# Altium PCB SS_MB_CONV1.1.PcbDoc (part 2 of 3)
Units mil, origin at the board's own origin, x right, y up, seen from the top; angles counter-clockwise.
Board outline 10350 x 8520 mil, 2 copper layers (Top Layer, Bottom Layer); 190 components, 282 nets, 1015 pads, 457 vias.
Unrouted connection lines stored in the file: 1.
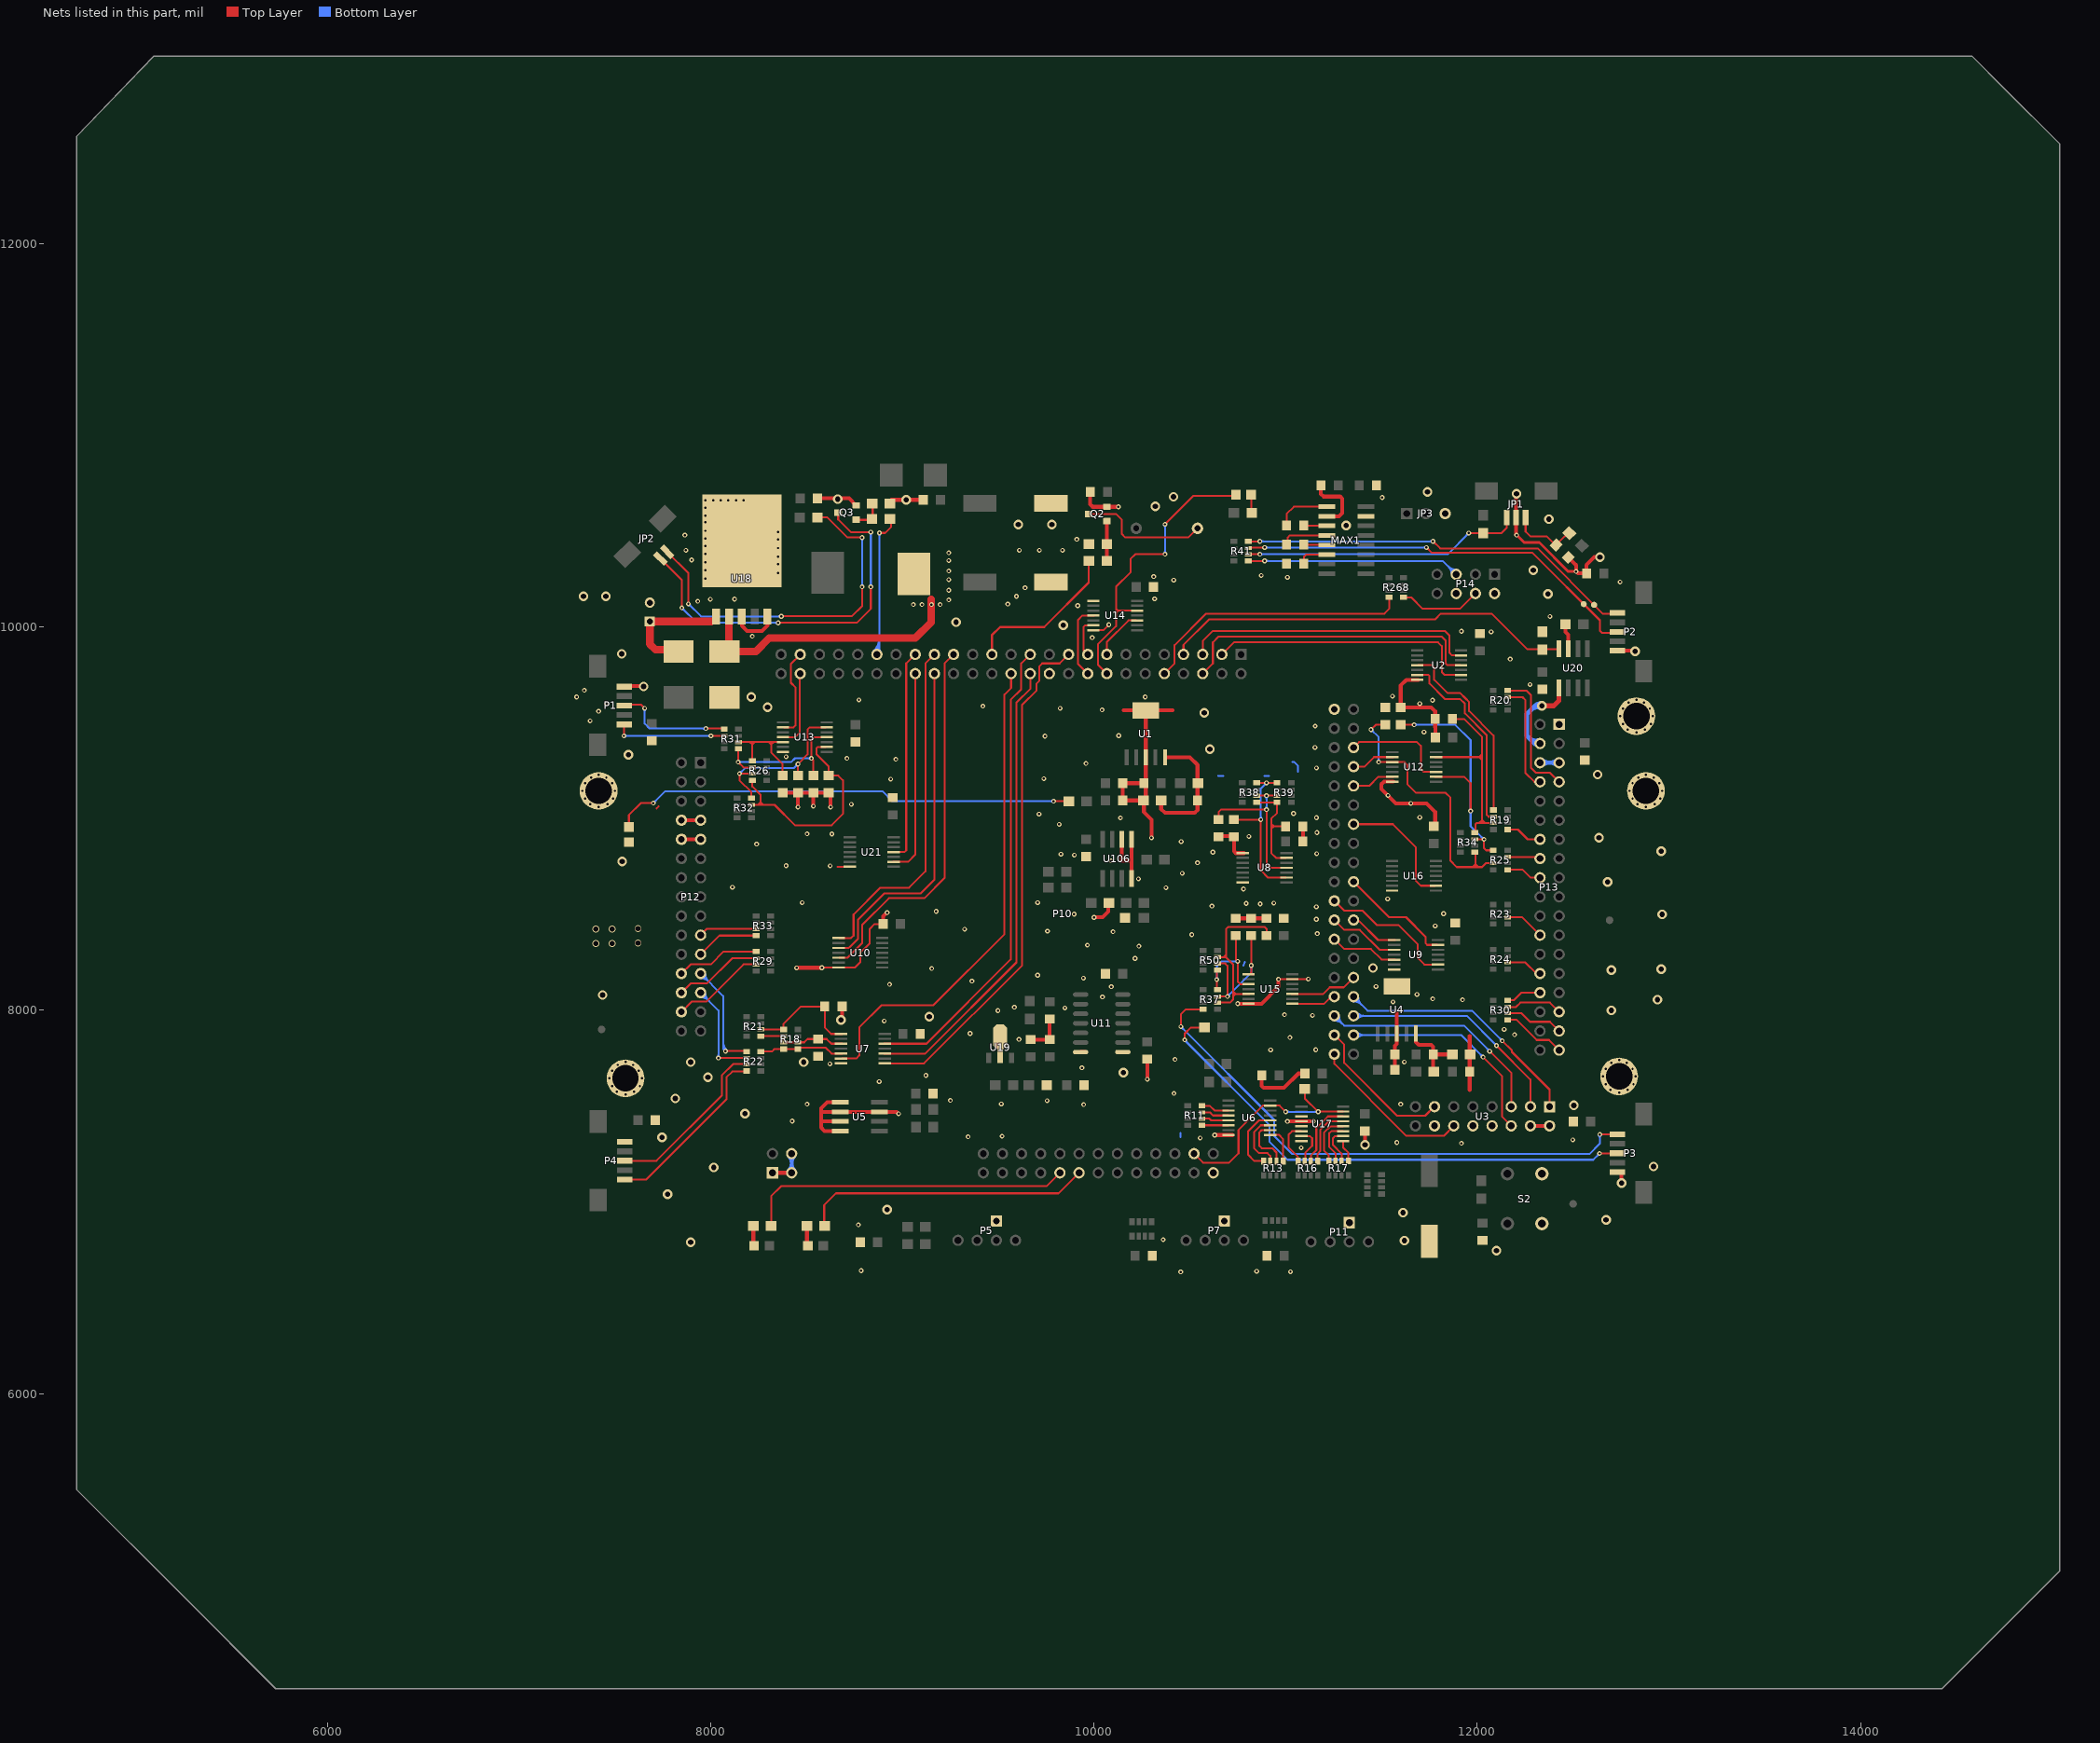
[diagram p2: the nets of this part, all layers, seen from the top]

## Via types
v1: diameter 25, hole 12, Top Layer to Bottom Layer, 365 vias
v2: diameter 50, hole 28, Top Layer to Bottom Layer, 86 vias
v3: diameter 35, hole 28, Top Layer to Bottom Layer, 6 vias

## Nets (pads, with @x,y where several pads share a name; then routed paths per layer and width w, separated by ;. In a path a pad name is that pad's centre, name@x,y a point inside that pad or via, vN(x,y) a via of type N, cw(c..) or ccw(c..) an arc to the next point about the centre after c; other vN are vias at no path point) (continued)
BT_2_F: P10.3 U2.9 | length 1418.6
  Top Layer w10: P10.3@10667,9857 10730,9920 11795,9920 11815,9900 11815,9765 11830,9750 U2.9@11910,9750
BT_3: P13.31 R30.4 | length 293.4
  Top Layer w10: R30.4@12162.99,8017 12202,8017 12225,8040 12379,8040 P13.31@12427,7992
BT_3_F: P10.127 U9.1 | length 260.7
  Top Layer w10: P10.127@11354,8471 11378,8471 11482.23,8366.77 U9.1@11571.5,8366.77
BT_4: P12.28 R29.5 | length 492.7
  Top Layer w10: P12.28@7847,7992 7900,8045 7975.96,8045 8170.96,8240 R29.5@8237.01,8240
BT_4_F: P10.31 U10.5 | length 1962.8
  Top Layer w10: U10.5@8671.5,8274.41 8714.41,8274.41 8790,8350 8790,8445 8930,8585 9115,8585 9220,8690 9220,9810 P10.31@9267,9857
BT_DB: P13.24 R23.6 | length 202.5
  Top Layer w10: R23.6@12162.99,8485 12234,8485 P13.24@12327,8392
BT_DB_F: P10.137 U16.9 | length 660
  Top Layer w10: P10.137@11354,8971 11559,8971 11680,8850 11680,8675 11705,8650 U16.9@11778.5,8650
BUZZER: P10.27 R3.1 | length 832.7
  Top Layer w12: P10.27@9467,9857 9467,9957 9510,10000 9740,10000 9972,10232 9972,10343 R3.1@9974,10345
C_CE: P10.114 U3.12 | length 850.3
  Top Layer w10: P10.114@11254,7771 11254,7721 11630,7345 11825,7345 U3.12@11877,7397
C_CLK1: P10.117 U3.3 | length 1379.1
  Top Layer w10: v1(12100,7816) 12277,7639 12277,7603 U3.3@12277,7497
  Bottom Layer w10: P10.117@11354,7971 11909,7971 11945,7971 v1(12100,7816) ; P10.117@11364.27,7960.73 cw(c11389.07,7935.93) 11389.07,7971 cw(c11389.07,8006.07) P10.117@11364.27,7981.27 ; P10.117@11371.34,7953.66 cw(c11413.21,7911.79) 11413.21,7971 cw(c11413.21,8030.21) P10.117@11371.34,7988.34 ; v1@12092.5,7816 ccw(c12074.39,7816) 12087.2,7828.8 ccw(c12100,7841.61) v1@12100,7823.5
C_CS: P10.115 U3.6 | length 1315.8
  Top Layer w10: v1@12033,7753 12130,7656 12130,7444 U3.6@12177,7397
  Bottom Layer w10: P10.115@11354,7871 11915,7871 v1(12030,7756) ; P10.115@11364.27,7860.73 cw(c11389.07,7835.93) 11389.07,7871 cw(c11389.07,7906.07) P10.115@11364.27,7881.27 ; P10.115@11371.34,7853.66 cw(c11413.21,7811.79) 11413.21,7871 cw(c11413.21,7930.21) P10.115@11371.34,7888.34 ; v1@12022.5,7756 ccw(c12004.39,7756) 12017.2,7768.8 ccw(c12030,7781.61) v1@12030,7763.5
C_DATA: P10.119 U3.1 | length 1494.7
  Top Layer w10: v1(12130,7841) 12131,7841 12180,7792 12180,7783 12377,7586 12377,7558 U3.1@12377,7497
  Bottom Layer w10: P10.119@11354,8046.47 cw(c11354,7987.26) 11395.87,8029.13 cw(c11437.74,8071) P10.119@11378.53,8071 ; P10.119@11354,8056.47 cw(c11354,8021.4) 11378.8,8046.2 cw(c11403.6,8071) P10.119@11368.53,8071 ; P10.119@11354,8071 11427,7998 11937,7998 11973,7998 v1(12130,7841) ; v1@12122.5,7841 ccw(c12104.39,7841) 12117.2,7853.8 ccw(c12130,7866.61) v1@12130,7848.5
C_DR1: P10.118 U3.5 | length 1399.6
  Top Layer w10: v1(12065,7786) 12177,7674 12177,7638 U3.5@12177,7497
  Bottom Layer w10: P10.118@11254,7946.47 cw(c11254,7887.26) 11295.87,7929.13 cw(c11337.74,7971) P10.118@11278.53,7971 ; P10.118@11254,7956.47 cw(c11254,7921.4) 11278.8,7946.2 cw(c11303.6,7971) P10.118@11268.53,7971 ; P10.118@11254,7971 11305,7920 11895,7920 11931,7920 v1(12065,7786) ; v1@12057.5,7786 ccw(c12039.39,7786) 12052.2,7798.8 ccw(c12065,7811.61) v1@12065,7793.5
C_PWR: P10.116 U3.13 | length 772.5
  Top Layer w10: P10.116@11254,7871 11305,7820 11305,7725 11580,7450 11727.88,7450 11774.88,7497 U3.13@11777,7497
CB_1: P12.19 R33.5 | length 303.7
  Top Layer w10: P12.19@7947,8392 7980,8425 R33.5@8237.01,8425
CB_1_F: P10.35 U21.11 | length 1115.4
  Top Layer w10: U21.11@8950,8825.59 9010.59,8825.59 9020,8835 9020,9810 P10.35@9067,9857
CB_2: P13.8 R20.4 | length 586.8
  Top Layer w10: R20.4@12160,9634 12236,9634 12250,9620 12250,9240 12298,9192 P13.8@12327,9192 P13.8@12317,9202
CB_2_F: P10.6 U2.11 | length 1619.3
  Top Layer w10: P10.6@10567,9757 10620,9810 10620,9920 10650,9950 11815,9950 11835,9930 11835,9810 11843.82,9801.18 U2.11@11910,9801.18
CB_3: P13.33 R30.6 | length 302.5
  Top Layer w10: R30.6@12162.99,7985 12230,7985 12275,7940 12379,7940 P13.33@12427,7892
CB_3_F: P10.128 U9.3 | length 381.9
  Top Layer w10: P10.128@11254,8471 11305,8420 11387,8420 11491.41,8315.59 U9.3@11571.5,8315.59
CB_4: P12.26 R29.3 | length 464.6
  Top Layer w10: P12.26@7847,8092 7895,8140 7980,8140 8112,8272 R29.3@8237.01,8272
CB_4_F: P10.34 U10.3 | length 1794.2
  Top Layer w10: U10.3@8671.5,8325.59 8720.59,8325.59 8727.65,8332.65 ; 8740,8345 8727.65,8332.65 ; P10.34@9167,9757 9167,8682 9095,8610 8905,8610 8768,8473 8768,8373 8727.65,8332.65
CB_DB: P13.30 R30.2 | length 180.6
  Top Layer w10: R30.2@12162.99,8052 12190,8052 12230,8092 P13.30@12327,8092
CB_DB_F: P10.130 U9.9 | length 714.6
  Top Layer w10: P10.130@11254,8571 11305,8520 11400,8520 11475,8445 11588,8445 11690,8343 11690,8273.08 11724.26,8238.82 U9.9@11790,8238.82
CHIP: P13.4 U20.5 | length 665.2
  Top Layer w10: P13.4@12327,9392 P13.4@12337,9392
  Top Layer w25: v2(12337,9589) 12399,9589 12425,9615 U20.5@12425,9682.64
  Bottom Layer w25: 12272,9419 ccw(c12305.26,9452.25) P13.4@12321.22,9408.02 ; 12284.5,9571.5 cw(c12312.08,9543.92) v2@12330.95,9578.06 ; 12298.59,9585.59 cw(c12337,9547.18) v2@12337,9601.5 ; P13.4@12327,9392 12299,9392 12258,9433 12258,9545 12302,9589 v2(12337,9589) ; v2@12328.16,9580.16 ccw(c12306.82,9558.82) 12306.82,9589 ccw(c12306.82,9619.18) v2@12328.16,9597.84
CHIP_F: P10.7 R191.2 U20.4 | length 2153.1
  Top Layer w10: P10.7@10467,9857 10467,9907 10600,10040 11780,10040 11810,10070 12075,10070 12260,9885 12340,9885 12422.64,9885 U20.4@12425,9887.36
CON1_RESET: P10.96 R40.1 U6.15 U17.15 | length 1227.9
  Top Layer w10: P10.96@10522,7252 10569,7205 10705,7205 10753.98,7253.98 10753.98,7375.35 10880.99,7502.36 U6.15@10920,7502.36 10968,7502.36 v1(11000,7470.36) 10988,7482.36 ; R40.1@11100,7590 11100,7539.86 v1(11169.5,7470.36) 11170.91,7471.77 U17.15@11300,7471.77
  Bottom Layer w10: v1(11000,7470.36) v1(11169.5,7470.36) ; v1@11005.3,7465.06 cw(c11018.11,7452.26) 11018.11,7470.36 cw(c11018.11,7488.47) v1@11005.3,7475.67 ; v1@11164.19,7465.06 ccw(c11151.39,7452.26) 11151.39,7470.36 ccw(c11151.39,7488.47) v1@11164.19,7475.67
CT_1: P12.21 R33.7 | length 330.6
  Top Layer w10: P12.21@7947,8292 8045,8390 R33.7@8237.01,8390
CT_1_F: P10.36 U21.9 | length 1077.6
  Top Layer w10: U21.9@8950,8774.41 9029.41,8774.41 9067,8812 P10.36@9067,9757
CT_2: P13.7 R20.2 | length 687.2
  Top Layer w10: R20.2@12160,9669 12161,9668 12257,9668 12280,9645 12280,9265 12305,9240 12379,9240 P13.7@12427,9192
CT_2_F: P10.5 U2.13 | length 1540.5
  Top Layer w10: P10.5@10567,9857 10567,9927 10620,9980 11830,9980 11855,9955 11855,9865 11867.64,9852.36 U2.13@11910,9852.36
CT_3: P13.35 R30.8 | length 329.5
  Top Layer w10: R30.8@12162.99,7950 12205,7950 12310,7845 12374,7845 P13.35@12427,7792
CT_3_F: P10.126 U9.5 | length 361.6
  Top Layer w10: P10.126@11254,8371 11305,8320 11445,8320 11500,8265 11570.91,8265 U9.5@11571.5,8264.41
CT_4: P12.24 R29.1 | length 437.6
  Top Layer w10: P12.24@7847,8192 7895,8240 8000,8240 8067,8307 R29.1@8237.01,8307
CT_4_F: P10.33 U10.1 | length 1808.6
  Top Layer w10: U10.1@8671.5,8376.77 8731.77,8376.77 8745,8390 8745,8500 8885,8640 9035,8640 9120,8725 9120,9810 P10.33@9167,9857
CT_DB: P13.28 R24.6 | length 188
  Top Layer w10: R24.6@12162.99,8250 12250,8250 12308,8192 P13.28@12327,8192
CT_DB_F: P10.131 U9.13 | length 592.5
  Top Layer w10: P10.131@11354,8671 11539,8486 11628,8486 11730,8384 11730,8350 11738.82,8341.18 U9.13@11790,8341.18
ENCODEA_1: P1.5 R31.3 | length 655.7
  Top Layer w10: v1(7547,9432) v1@7547,9438 ; v1@7547.8,9432 P1.5@7547.8,9491.85 ; v1(8001,9432) R31.3@8080,9432
  Bottom Layer w10: v1(7547,9432) v1(8001,9432) ; v1@7552.3,9426.7 cw(c7565.11,9413.89) 7565.11,9432 cw(c7565.11,9450.11) v1@7552.3,9437.3 ; v1@7995.7,9426.7 ccw(c7982.89,9413.89) 7982.89,9432 ccw(c7982.89,9450.11) v1@7995.7,9437.3
ENCODEA_1_F: P10.48 U13.4 | length 408.5
  Top Layer w10: U13.4@8381.5,9425.59 8440.59,9425.59 8465,9450 8465,9755 P10.48@8467,9757 P10.48@8472,9752
ENCODEA_2: P2.5 P21.1 R41.2 | length 2170.5
  Top Layer w10: R41.2@10792.99,10447 v1@10863,10447 ; v1(11769,10447) 11806,10410 12315,10410 12656.15,10068.85 P2.5@12752,10068.85
  Bottom Layer w10: v1(10865,10447) v1(11769,10447) ; v1@10870.3,10441.7 cw(c10883.11,10428.89) 10883.11,10447 cw(c10883.11,10465.11) v1@10870.3,10452.3 ; v1@11763.7,10441.7 ccw(c11750.89,10428.89) 11750.89,10447 ccw(c11750.89,10465.11) v1@11763.7,10452.3
ENCODEA_2_F: P10.18 U14.4 | length 396.4
  Top Layer w10: P10.18@9967,9757 9915,9809 9915,10035 9940,10060 U14.4@10001.5,10060
ENCODEA_3: P3.5 R37.7 | length 2926.8
  Top Layer w10: v1(10453,7915) 10453,7978 10480,8005 R37.7@10577.01,8005 ; v1(12639,7352) 12729.36,7352 P3.5@12730,7352.64
  Bottom Layer w10: v1@10453,7907.5 cw(c10453,7889.39) 10465.8,7902.2 cw(c10478.61,7915) v1@10460.5,7915 ; v1(10453,7915) 10940,7428 10940,7345 11035,7250 12585,7250 12639,7304 v1(12639,7352) ; v1@12633.7,7346.7 cw(c12620.89,7333.89) 12639,7333.89 cw(c12657.11,7333.89) v1@12644.3,7346.7
ENCODEA_3_F: P10.121 U15.10 | length 359.4
  Top Layer w10: U15.10@11030,8085.59 11195.59,8085.59 11230,8120 11303,8120 P10.121@11354,8171
ENCODEA_4: P4.5 R22.7 | length 934.8
  Top Layer w10: P4.5@7550,7116.57 7663.57,7116.57 8082,7535 8082,7650 8112,7680 R22.7@8184.01,7680
ENCODEA_4_F: P10.19 U7.8 | length 2708.4
  Top Layer w10: U7.8@8903.5,7723.23 9113.23,7723.23 9625,8235 9625,9595 9700,9670 9700,9705 9715,9720 9715,9795 9730,9810 9820,9810 P10.19@9867,9857
ENCODEB_1: P1.3 R31.1 | length 680.9
  Top Layer w10: P1.3@7547.8,9590.28 7552.52,9595 7636,9595 v1(7655,9576) ; v1(7975,9470) 8067,9470 R31.1@8070,9467
  Bottom Layer w10: v1@7649.7,9570.7 cw(c7636.89,9557.89) 7655,9557.89 cw(c7673.11,9557.89) v1@7660.3,9570.7 ; v1(7655,9576) 7655,9496 7681,9470 v1(7975,9470) ; v1@7969.7,9464.7 ccw(c7956.89,9451.89) 7956.89,9470 ccw(c7956.89,9488.11) v1@7969.7,9475.3
ENCODEB_1_F: P10.47 U13.2 | length 465.8
  Top Layer w10: U13.2@8381.5,9476.77 8431.77,9476.77 8443,9488 8443,9684 8418,9709 8418,9808 P10.47@8467,9857
ENCODEB_2: P2.3 P20.1 R41.4 | length 2216.5
  Top Layer w10: R41.4@10792.99,10412 10795.99,10415 v1(10890,10415) ; v1(11735,10415) 11763,10387 12288,10387 12640,10035 12640,9980 12649.57,9970.43 P2.3@12735,9970.43
  Bottom Layer w10: v1(10890,10415) v1(11735,10415) ; v1@10895.3,10409.7 cw(c10908.11,10396.89) 10908.11,10415 cw(c10908.11,10433.11) v1@10895.3,10420.3 ; v1@11729.7,10409.7 ccw(c11716.89,10396.89) 11716.89,10415 ccw(c11716.89,10433.11) v1@11729.7,10420.3
ENCODEB_2_F: P10.17 U14.6 | length 212.3
  Top Layer w10: P10.17@9967,9857 9945,9879 9945,10000 9953.82,10008.82 U14.6@10001.5,10008.82
ENCODEB_3: P3.3 R42.2 | length 2792.3
  Top Layer w10: v1(10473,7846) 10473,7878 10505,7910 R42.2@10580,7910 ; v1@12638,7253.12 12728.91,7253.12 P3.3@12730,7254.21 ; P3.3@12751.57,7250 P3.3@12752,7250.43
  Bottom Layer w10: v1@10473,7838.5 cw(c10473,7825.22) 10482.39,7834.61 ; v1(10473,7846) 10473,7844 10915,7402 10915,7315 11010,7220 12605,7220 v1(12638,7253) ; v1@10480.5,7846 ccw(c10503.43,7846) 10487.22,7829.78 ; v1@12630.5,7253 cw(c12612.39,7253) 12625.2,7240.2 cw(c12638,7227.39) v1@12638,7245.5
ENCODEB_3_F: P10.120 U15.8 | length 239.2
  Top Layer w10: U15.8@11030,8034.41 11200.41,8034.41 11237,8071 P10.120@11254,8071
ENCODEB_4: P4.3 R22.5 | length 905.7
  Top Layer w10: P4.3@7550,7215 7717,7215 8059,7557 8059,7662 8117,7720 R22.5@8185.01,7720
ENCODEB_4_F: P10.24 U7.10 | length 2425.3
  Top Layer w10: U7.10@8903.5,7774.41 9119.41,7774.41 9595,8250 9595,9605 9667,9677 P10.24@9667,9757
FAULT_1: P12.23 R22.1 | length 791.6
  Top Layer w10: v1(8077,7787) 8185.01,7787 R22.1@8187.01,7785
  Bottom Layer w10: P12.23@7947,8167.47 cw(c7947,8108.26) 7988.87,8150.13 cw(c8030.74,8192) P12.23@7971.53,8192 ; P12.23@7947,8177.47 cw(c7947,8142.4) 7971.8,8167.2 cw(c7996.6,8192) P12.23@7961.53,8192 ; P12.23@7947,8192 8065,8074 8065,7799 v1(8077,7787) ; 8065,7809.94 ccw(c8099.94,7809.94) v1@8075.23,7785.23 ; 8065,7834.08 ccw(c8124.08,7834.08) v1@8082.3,7792.3
FAULT_1_F: P10.26 U7.6 | length 3849.9
  Top Layer w10: U7.6@8685,7748.82 8758.82,7748.82 8775,7765 8775,7865 ; 8775,7890 8775,7865 ; P10.26@9567,9757 9567,9682 9532.5,9647.5 ; 8775,7865 8775,7909.99 8892.01,8027 9162,8027 9532.5,8397.5 ; 9532.5,8397.5 9532.5,9647.5 ; 9532.5,8397.5 9532.5,9647.5
FAULT_2: P13.16 R25.4 | length 170.3
  Top Layer w10: R25.4@12160,8800 12319,8800 P13.16@12327,8792
FAULT_2_F: P10.143 U12.2 | length 228.3
  Top Layer w10: P10.143@11354,9271 11411,9271 11461.18,9321.18 U12.2@11561.5,9321.18
FAULT_3: P13.18 R25.8 | length 184
  Top Layer w10: R25.8@12160,8733 12237,8733 12278,8692 P13.18@12327,8692
FAULT_3_F: P10.141 U12.6 | length 227.3
  Top Layer w10: P10.141@11354,9171 11436,9171 11483.82,9218.82 U12.6@11561.5,9218.82
FAULT_4: P12.25 R22.3 | length 703.5
  Top Layer w10: v1(8040,7751) 8186.01,7751 R22.3@8187.01,7750
  Bottom Layer w10: P12.25@7947,8067.47 cw(c7947,8008.26) 7988.87,8050.13 cw(c8030.74,8092) P12.25@7971.53,8092 ; P12.25@7947,8077.47 cw(c7947,8042.4) 7971.8,8067.2 cw(c7996.6,8092) P12.25@7961.53,8092 ; P12.25@7947,8092 8040,7999 v1(8040,7751) ; v1@8034.7,7756.3 ccw(c8021.89,7769.11) 8040,7769.11 ccw(c8058.11,7769.11) v1@8045.3,7756.3
FAULT_4_F: P10.23 U7.12 | length 2477.8
  Top Layer w10: U7.12@8903.5,7825.59 9125.59,7825.59 9565,8265 9565,9620 9620,9675 9620,9810 P10.23@9667,9857
FAULT_DB: P13.14 R19.8 | length 188.1
  Top Layer w10: R19.8@12160,8943 12212,8943 12263,8892 P13.14@12327,8892
FAULT_DB_F: P10.145 U12.10 | length 572.8
  Top Layer w10: P10.145@11354,9371 11383,9400 11685,9400 11705,9380 11705,9260 11720.59,9244.41 U12.10@11780,9244.41
GND: C1.2 C2.2 C3.1 C4.2 C5.2 C6.2 C8.1 C9.1 C11.2 C14.1 C15.1 C16.1 C17.1 C18.2 C19.1 C20.1 C21.1 C22.1 C23.1 C24.1 C25.1 C26.1 C27.1 C28.1 C29.1 C30.1 C31.1 C32.1 C33.1 C34.1 C35.2 C36.1 C37.1 C38.1 C39.1 C40.2 C41.1 C42.1 C43.1 C44.2 C45.1 C46.1 C47.2 C48.1 C49.1 C50.1 C51.2 C52.2 C53.2 C54.2 C55.2 C56.2 C57.2 C58.2 C59.2 C60.2 C61.2 C62.2 C63.2 C64.2 C65.2 C66.2 C67.2 C69.2 D4.1 DS4.2 JP1.2 JP3.3 MAX1.15 P1.1 P2.1 P3.1 P4.1 P5.1 P7.1 P10.22 P10.51 P10.53 P10.54 P10.97 P10.150 P11.1 P12.7 P12.8 P12.9 P12.10 P13.1 P13.5 P13.6 P14.2 P14.6 P15.1 P16.1 P17.1 P18.1 P19.1 pad.8 Q2.2 Q3.2 R4.2 R7.2 R8.2 R14.1 R48.2 R184.2 R190.1 R191.1 S2.1 U1.3 U1.6 U2.7 U3.2 U3.4 U3.8 U3.10 U3.14 U4.3 U4.6 U5.1 U5.2 U5.3 U5.4 U5.7 U6.8 U7.7 U8.1 U8.7 U9.7 U10.7 U11.7 U11.8 U12.7 U13.7 U14.1 U14.7 U15.7 U15.13 U16.7 U17.3 U17.4 U17.5 U17.8 U18.3 U18.5 U18.6 U19.0 U19.2 U20.3 U21.7 U106.4 U106.5 U106.6 | length 11335.9
  Top Layer w8: C59.2@10715,8910 10730,8895 C59.2@10730,8910
  Top Layer w10: 7716.67,9053.1 7727.9,9064.33 ; v1(8448,8221) 8450.23,8223.23 8671.5,8223.23 8753.23,8223.23 8780,8250 8780,8300 8829,8349 8829,8424 8855,8450 C27.1@8900,8450 ; 8660.82,8748.82 U21.7@8731.5,8748.82 ; U14.7@10001.5,9983.23 10048.23,9983.23 v1(10077,10012) ; v1(10962.64,8162.36) 11030,8162.36 11117.36,8162.36 v1(11118,8163)
  Top Layer w15: v1(12205,10480) 12244,10441 12323.42,10441 12474.42,10290 v1(12515,10290)
  Top Layer w20: P1.1@7547.8,9692 7648,9692 v2(7650,9690) ; P12.10@7847,8892 P12.9@7947,8892 ; P12.8@7847,8992 P12.7@7947,8992 ; U18.3@8162,10055.66 8162,10007 8190,9979 8266.68,9979 8295.86,10008.18 U18.5@8295.86,10055.66 ; U18.6@8162,10449 U18.6@8334.76,10621.76 ; P10.51@8322,7152 P10.53@8422,7152 ; C64.2@8375,9135 C60.2@8455,9135 ; v1(8448,8221) 8449,8222 v1(8580,8222) ; v1(8455,9060) C60.2@8455,9135 ; v1(8535,9065) C62.2@8535,9135 ; C45.1@8557,10672 8721.65,10672 Q3.2@8759.24,10634.4 ; v1(8625,9060) 8625,9125 C58.2@8615,9135 C62.2@8535,9135 ; U5.4@8675.28,7370 8593.64,7370 8575.64,7388 8575.64,7418 ; U5.3@8675.28,7420 8577.64,7420 8575.64,7418 ; U5.1@8675.28,7520 8607.64,7520 8575.64,7488 8575.64,7468 ; v2(8680,7950) 8685,7955 C54.2@8685,8020 ; C27.1@8900,8450 8900,8490 v1(8920,8510) ; R7.2@8943,10664 C3.1@9109,10664 ; v1(8980,7460) 8970,7470 U5.7@8880,7470 U5.2@8675.28,7470 8577.64,7470 8575.64,7468 ; U19.0@9490,7855 9510,7835 U19.2@9510,7761.23 U19.0@9510,7861.63 ; C16.1@9670,7847 C17.1@9770,7847 9768,7849 C43.1@9768,7955 ; U11.7@9930,7782 U11.7@9953,7782 ; C19.1@9980,10705 9980,10640 9992.6,10627.4 Q2.2@10067.24,10627.4 v1(10127.4,10627.4) ; v1(10000,8485) 10045,8485 10075,8515 R184.2@10075,8560 ; U106.6@10145,8892.36 10145,8780 10190,8780 ; 10155,9565 U1.6@10270,9565 ; U106.4@10195,8687.64 10195,8775 10190,8780 ; U106.5@10195,8892.36 10195,8785 10190,8780 ; C40.2@10260,9185 C1.2@10150,9185 C6.2@10150,9095 R8.2@10260,9095 ; U1.3@10270,9320 10270,9105 R8.2@10260,9095 ; U1.3@10270,9325 U1.6@10270,9565 ; U1.6@10270,9570 U1.6@10270,9565 ; v1(10278,7640) C14.1@10278,7745 ; v1(10300,8900) 10300,8995 10260,9035 R8.2@10260,9095 ; 10410,9565 U1.6@10270,9565 ; v1(10630,7349) 10630.18,7348.82 U6.8@10722,7348.82 ; C66.2@10650,8910 C59.2@10715,8910 ; C59.2@10730,8895 10730,8830 10739.41,8820.59 U8.1@10781.5,8820.59 ; C63.2@10740,8480 C61.2@10820,8480 C57.2@10900,8480 ; v1@10750.59,8034.41 10811.5,8034.41 10873.41,8034.41 10962.64,8123.64 v1(10962.64,8162.36) ; C37.1@10875,7660 10875,7605 10885,7595 10991,7595 11066,7670 C41.1@11100,7670 ; v1(11009.5,7420.36) U17.4@11081.27,7420.36 ; U17.4@11081.5,7420.59 v1(11144.72,7420.59) ; C31.1@11090,8880 C65.2@11090,8960 ; v2(11413.88,7297.65) v2@11413.96,7297.65 ; v2@11414,7297.69 C5.2@11414,7370 ; U12.7@11561.5,9193.23 11513.23,9193.23 11500,9180 11500,9155 11575,9080 11735,9080 11780,9035 C26.1@11780,8960 ; C67.2@11570,7690 C56.2@11570,7770 11570,7815 11580,7825 U4.3@11580,7880 11580,7985 ; U2.7@11691.5,9724.41 11629.43,9724.41 11600,9694.98 C55.2@11600,9580 11755,9580 ; 11755,9579.59 11760.41,9579.59 11780,9560 C52.2@11780,9520 C25.1@11781,9423 ; 11960,7585 C69.2@11960,7680 ; 11960,7865 R48.2@11960,7770 ; JP1.2@12202,10552 12202,10692 v2(12205,10695) ; JP1.2@12202.79,10572 12202.79,10482.21 v1(12205,10480) ; U3.4@12277,7397 U3.2@12377,7397 ; S2.1@12331,6881 S2.1@12337,6887 ; R190.1@12460,10015 12460,9975 12475,9960 U20.3@12475,9887.36 ; C18.2@12474.05,10364.05 12515,10323.11 v1(12515,10290) 12525,10280 C21.1@12570,10280 12570,10323.44 12611.56,10365 v2(12640,10365) ; P2.1@12730,9876.57 12819.43,9876.57 v2(12823,9873) ; v2@12752,7099 P3.1@12752,7152 ; C60.2@8455,9135 C62.2@8535,9135 ; 8575.64,7418 8575.64,7468 ; C69.2@11960,7680 R48.2@11960,7770 ; C69.2@11960,7680 R48.2@11960,7770
  Bottom Layer w10: 10452,7338.5 10452,7359.5 ; 10647.39,9222.39 10648,9223 10674.5,9223 ; 10780,8232.5 10787.42,8252.57 ; 10889.5,9223 10911.72,9223 10912.29,9222.43 ; 11034.29,9295.23 11045.01,9295.23 11060,9280.25 11065,9275.25 11065,9245.04
  Bottom Layer w20: P10.53@8408.19,7165.81 ccw(c8374.86,7199.14) 8422,7199.14 ccw(c8469.14,7199.14) P10.53@8435.81,7165.81 ; P10.54@8408.19,7238.19 cw(c8374.86,7204.86) 8422,7204.86 cw(c8469.14,7204.86) P10.54@8435.81,7238.19 ; P10.53@8422,7152 P10.54@8422,7252 ; P13.6@12327,9292 P13.5@12427,9292 ; P13.6@12340.81,9278.19 cw(c12374.14,9244.86) 12374.14,9292 cw(c12374.14,9339.14) P13.6@12340.81,9305.81 ; P13.5@12413.19,9278.19 ccw(c12379.86,9244.86) 12379.86,9292 ccw(c12379.86,9339.14) P13.5@12413.19,9305.81
  other v1: 10452,6635 11025,6636 10849,6638 8785,6641 10361,6803 8770,6880 11081,7283 11917,7306 11580,7310 12498,7324 10554,7334 9343,7340 9520,7343 8425,7422 9946,7508 8503,7510 11600,7510 9516,7511 9755,7528 9250,7530 7555,7560 10417,7566 12740,7570 7510,7575 7600,7575 12695,7585 12785,7585 7485,7605 7630,7605 12670,7615 12815,7615 8879,7628 7470,7645 7640,7645 12655,7655 12825,7655 9123,7660 7485,7685 7625,7685 12670,7695 12810,7695 9937,7700 7515,7715 7595,7715 8622,7720 12700,7725 12780,7725 7555,7730 11619,7730 12740,7740 10422,7744 10922,7793 11157,7794 9608.43,7848 11022,7858 12194,7873 9353,7879 12140,7900 8905,7944 11140,7973 10994,7977 9498,7998 9848,8012 9584,8016 10750,8035 11560,8044 11923,8055 11767,8060 10044,8070 11685,8083 10090,8123 11471,8124 8933,8135 9363,8152 9945,8168 9706,8183 9153,8218 10214,8271 10234,8335 9965,8340 10510,8395 11165,8400 10099,8410 9757,8413 9325,8423 11780,8440 11160,8475 9896,8502 11824,8504 9176,8516 11160,8540 10615,8544 10867,8555 10794,8558 10938,8559 8477,8562 9706,8562 11532,8581 10780,8633 10375,8640 8113,8642 10232,8686 10460,8715 8623,8754 8393,8755 10540,8770 10089,8780 9897,8810 9827,8815 11162,8817 10620,8825 8239,8867 10455,8880 10808,8907 8632,8920 8503,8921 11163,8927 9818,8970 10138,9004 11161,9005 11700,9007 9713,9024 11041,9027 7415,9060 12880,9060 7370,9075 7460,9075 8734,9075 12835,9075 12925,9075 11653,9080 7345,9105 7490,9105 12810,9105 12955,9105 11533.98,9121.02 7330,9145 7500,9145 12795,9145 12965,9145 7345,9185 7485,9185 12810,9185 12950,9185 8939,9206 9738,9209 7375,9215 7455,9215 12840,9215 12920,9215 7415,9230 12880,9230 11161,9265 9958,9288 8966,9310 8710,9315 8393,9323 11153,9372 9744,9431 10128.66,9433 12830,9450 11722,9452 12785,9465 12875,9465 11154,9483 12760,9495 12905,9495 7370,9510 12745,9535 12915,9535 7415,9560 10042,9568 12760,9575 12900,9575 9823,9576 9420,9587 7455,9600 11700,9600 12790,9605 12870,9605 11766,9618 8773,9620 12830,9620 7300,9635 10267,9635 11557,9639 7340,9670 12275,9700 12172,9833 9990,9945 8217,9952 12072,9975 11917,9978 12379,10055 9915,10111.46 9550,10120 7932,10134 7998,10145 8124,10146 10316,10147 9595,10160 9640,10205 12745,10235 10416,10245 11009,10259 10311,10263 10872,10269 7900,10350 7870,10400 9610,10400 9715,10400 9835,10400 9910,10458 7865,10480 11504,10676
  other v2: 12100,6746 7895,6790 11620,6798 12672,6906 11612,6944 8920,6960 7775,7040 12753,7099 8015,7180 12920,7185 7745,7337 8179,7461 12504,7504 7815,7540 7985,7650 10153,7675 7895,7730 8485,7730 9140,7967 12700,8000 12940,8055 7435,8080 12700,8210 12960,8215 11456,8221 12965,8500 12680,8670 7538,8777 12960,8830 12635,8900 12628,9230 7571,9334 10604,9363 10575,9552 8296,9582 8211,9635 7535,9860 9840,10010 9280,10025 7336.21,10160 7453,10160 12369,10173 12292,10296 11316,10530 9605,10535 9780,10535 12373,10563 10320,10630 9020,10664 8662,10667 10415,10680 11740,10705
  other v3: 7400,8349 7485,8349 7620,8351 7400,8424 7485,8424 7620,8426
INFRA_SIG_F: P10.39 R5.1 | length 973.1
  Top Layer w10: v1(8880,10491) 8910,10491 8940,10521 R5.1@8940,10555
  Bottom Layer w10: P10.39@8849.66,9874.34 ccw(c8776.4,9947.6) 8880,9947.6 ; P10.39@8856.73,9867.27 ccw(c8800.54,9923.46) 8880,9923.46 ; P10.39@8863.8,9860.2 ccw(c8824.68,9899.32) 8880,9899.32 ; P10.39@8867,9857 8880,9870 v1(8880,10491) ; v1@8874.7,10485.7 cw(c8861.89,10472.89) 8880,10472.89 cw(c8898.11,10472.89) v1@8885.3,10485.7 ; 8880,9884.83 ccw(c8894.83,9884.83) P10.39@8884.34,9874.34
INFRAIN: JP1.3 R41.6 R168.1 | length 1528.3
  Top Layer w10: R41.6@10792.99,10380 v1(10865,10380) ; v1(11955,10490) R168.1@12030,10490 12125,10490 12153.57,10518.57 JP1.3@12153.57,10572
  Bottom Layer w10: v1(10865,10380) 11845,10380 v1(11955,10490) ; v1@10870.3,10374.7 cw(c10883.11,10361.89) 10883.11,10380 cw(c10883.11,10398.11) v1@10870.3,10385.3 ; v1@11947.5,10490 cw(c11929.39,10490) 11942.2,10477.2 cw(c11955,10464.39) v1@11955,10482.5
INFRAIN_F: DS1.2 P10.16 U14.12 | length 1673
  Top Layer w10: P10.16@10067,9757 10020,9804 10020,9909 10115,10004 10115,10210 10190,10285 10190,10355 10215,10380 v1(10370,10380) ; 10115,10071 10115,10073.59 10127,10085.59 ; 10115,10085 10115.59,10085.59 10127,10085.59 ; 10115,10106 10115,10097.59 10127,10085.59 ; U14.12@10220,10085.59 10127,10085.59 ; v1(10370,10536) 10519,10685 DS1.2@10740,10685
  Bottom Layer w10: v1@10364.7,10385.3 ccw(c10351.89,10398.11) 10370,10398.11 ccw(c10388.11,10398.11) v1@10375.3,10385.3 ; v1@10364.7,10530.7 cw(c10351.89,10517.89) 10370,10517.89 cw(c10388.11,10517.89) v1@10375.3,10530.7 ; v1(10370,10380) v1(10370,10536)
IR+: JP2.1 R1.1 | length 2020.9
  Top Layer w10: JP2.1@7772,10392 7883,10281 v1(7883,10121) ; v1(8368,10056) 8736,10056 8790,10110 v1(8790,10210) ; R1.1@8557,10572 8608.5,10572 8713.5,10467 v1(8790,10467)
  Bottom Layer w10: v1@7883,10113.5 cw(c7883,10095.39) 7895.8,10108.2 cw(c7908.61,10121) v1@7890.5,10121 ; v1(7883,10121) 7949,10055 v1@8368,10055 ; 8347.48,10055 ccw(c8347.48,10076.52) v1@8362.7,10061.3 ; 8352.31,10055 cw(c8352.31,10040.31) v1@8362.7,10050.7 ; v1@8784.7,10215.3 ccw(c8771.89,10228.11) 8790,10228.11 ccw(c8808.11,10228.11) v1@8795.3,10215.3 ; v1@8784.7,10461.7 cw(c8771.89,10448.89) 8790,10448.89 cw(c8808.11,10448.89) v1@8795.3,10461.7 ; v1(8790,10210) v1(8790,10467)
IR-: JP2.2 Q3.3 | length 2099.3
  Top Layer w10: JP2.2@7737.2,10357.2 7849,10245.4 v1(7849,10100) ; v1(8352,10022) 8762,10022 8835,10095 v1(8835,10210) ; Q3.3@8664.76,10597 8664.76,10561.24 8731,10495 v1(8835,10495)
  Bottom Layer w10: v1@7849,10092.5 cw(c7849,10074.39) 7861.8,10087.2 cw(c7874.61,10100) v1@7856.5,10100 ; v1(7849,10100) 7927,10022 v1(8352,10022) ; v1@8346.7,10016.7 ccw(c8333.89,10003.89) 8333.89,10022 ccw(c8333.89,10040.11) v1@8346.7,10027.3 ; v1@8829.7,10215.3 ccw(c8816.89,10228.11) 8835,10228.11 ccw(c8853.11,10228.11) v1@8840.3,10215.3 ; v1@8829.7,10489.7 cw(c8816.89,10476.89) 8835,10476.89 cw(c8853.11,10476.89) v1@8840.3,10489.7 ; v1(8835,10210) v1(8835,10495)
LED1: P10.81 R49.1 | length 1712.5
  Top Layer w10: R49.1@8315,6875 8315,7030 8367,7082 9752,7082 P10.81@9822,7152
LED2: P10.83 R47.1 | length 1511.6
  Top Layer w10: R47.1@8592,6882 8592,6984 8653,7045 9123,7045 9815,7045 P10.83@9922,7152 P10.83@9922,7142
MISO: P14.5 R41.8 | length 1302.6
  Top Layer w10: R41.8@10792.99,10345 v1(10890,10345)
  Bottom Layer w10: v1(10890,10345) 11820,10345 P14.5@11890,10275 ; v1@10895.3,10339.7 cw(c10908.11,10326.89) 10908.11,10345 cw(c10908.11,10363.11) v1@10895.3,10350.3 ; P14.5@11865.47,10275 ccw(c11806.26,10275) 11848.13,10316.87 ccw(c11890,10358.74) P14.5@11890,10299.53 ; P14.5@11875.47,10275 ccw(c11840.4,10275) 11865.2,10299.8 ccw(c11890,10324.6) P14.5@11890,10289.53
MISO_F: P10.15 U14.10 | length 264.6
  Top Layer w10: P10.15@10067,9857 10067,9922 10179.41,10034.41 U14.10@10220,10034.41
MOSI: P14.4 R268.8 | length 445
  Top Layer w10: R268.8@11602.99,10155 11655,10155 11715,10095 11910,10095 P14.4@11990,10175
MOSI_F: P10.10 R268.7 | length 1428.7
  Top Layer w10: P10.10@10367,9757 10420,9810 10420,9905 10585,10070 11515,10070 11540,10095 R268.7@11540,10155
NetC7_2: C7.2 R2.2 R8.1 U1.5 | length 670.1
  Top Layer w20: R8.1@10350,9095 10350,9050 10370,9030 10525,9030 10540,9045 C7.2@10540,9095 10540,9185 10540,9280 10500,9320 U1.5@10371,9320
NetC9_2: C9.2 MAX1.6 | length 152.1
  Top Layer w10: C9.2@11096,10338 11096,10368 11106,10378 MAX1.6@11214,10378
NetC10_1: C10.1 MAX1.2 | length 327.4
  Top Layer w20: C10.1@11184,10738 11184,10695 11198,10681 11284,10681 11295,10670 11295,10595 11278,10578 MAX1.2@11214,10578
NetC12_1: C12.1 MAX1.1 | length 284.7
  Top Layer w10: C12.1@11005,10530 11005,10590 11043,10628 MAX1.1@11214,10628
NetC12_2: C12.2 MAX1.3 | length 177.1
  Top Layer w10: C12.2@11096,10538 11105,10538 11115,10528 MAX1.3@11214,10528 11159,10528
NetC13_1: C13.1 MAX1.4 | length 236.7
  Top Layer w10: C13.1@11011,10438 11011,10467.3 11021.7,10478 MAX1.4@11214,10478
NetC13_2: C13.2 MAX1.5 | length 115
  Top Layer w10: C13.2@11099,10428 MAX1.5@11214,10428
NetC18_1: C18.1 JP1.1 R167.1 | length 322.7
  Top Layer w10: JP1.1@12252,10572 12252,10498 12278,10472 12363,10472 12402.72,10432.28 12415,10432.28 12456.36,10473.64
NetC35_1: C35.1 D1.2 U18.1 | length 603
  Top Layer w40: D1.2@7832,9872 7812,9872 7801.5,9882.5 7711.5,9882.5 7682,9912 C35.1@7682,10029 8001.48,10029
NetC44_1: C44.1 R18.3 R18.5 R18.6 R21.8 U7.3 | length 460.5
  Top Layer w10: R21.8@8261.81,7865 R18.3@8380,7865 R18.5@8380,7833 R18.6@8442.99,7833 ; R18.6@8454.8,7833 8488,7833 8505,7850 8605,7850 8629.41,7825.59 U7.3@8685,7825.59
NetC52_1: C52.1 R19.5 R34.2 U12.13 | length 1138.8
  Top Layer w10: U12.13@11780,9321.18 12005,9321.18 ; C52.1@11870,9520 11930,9520 12025,9425 12025,9385 12025,9321.18 ; R34.2@11990,8927 11990,8970 11998,8978 12020,8978 ; 12010,8978 12025,8993 ; 12025,9304 12007.82,9321.18 12005,9321.18 ; 12025,9337 12009.18,9321.18 12005,9321.18 ; 12041,8978 12040,8978 12025,8993 ; R19.5@12097.01,8978 12020,8978 ; 12005,9321.18 12025,9321.18 ; 12020,8978 12025,8983 12025,8993 ; 12025,8993 12025,9321.18
NetC53_1: C53.1 R25.5 R34.8 U12.3 | length 1535.7
  Top Layer w10: v1(11445,9465) 11470,9490 C53.1@11520,9490 ; v1(11485,9295) 11485.59,9295.59 11561.5,9295.59 11619.41,9295.59 11635,9280 11635,9180 11680,9135 11835,9135 11860,9110 11860,8780 11892.5,8747.5 11990,8747.5 ; 11976,8747.5 11990,8761.5 11990,8763 ; R34.8@11990,8825 11990,8763 ; 12006,8747.5 12005.5,8747.5 11990,8763 ; R25.5@12083.01,8768 12045,8768 12024.5,8747.5 11990,8747.5 ; 11990,8747.5 11990,8763
  Bottom Layer w10: v1@11445,9457.5 cw(c11445,9439.39) 11457.8,9452.2 cw(c11470.61,9465) v1@11452.5,9465 ; v1(11445,9465) 11485,9425 v1(11485,9295) ; v1@11479.7,9300.3 ccw(c11466.89,9313.11) 11485,9313.11 ccw(c11503.11,9313.11) v1@11490.3,9300.3
NetC54_1: C54.1 R18.1 R21.6 U7.1 | length 614.2
  Top Layer w10: R21.6@8261.81,7900 R18.1@8380,7900 8380,7930 8470,8020 C54.1@8595,8020 8595,7910 8628.23,7876.77 U7.1@8685,7876.77
NetC55_1: C55.1 R25.1 R34.4 U12.9 | length 1548.5
  Top Layer w10: C55.1@11600,9490 v1(11670,9490) ; U12.9@11780,9218.82 11931.18,9218.82 11965,9185 v1(11965,9040) ; R34.4@11990,8892 v1(12035,8892) 12035,8846 12046,8835 R25.1@12083.01,8835
  Bottom Layer w10: v1(11670,9490) 11885,9490 11965,9410 v1(11965,9040) 11965,8960 v1@12035,8890 ; v1@11675.3,9484.7 cw(c11688.11,9471.89) 11688.11,9490 cw(c11688.11,9508.11) v1@11675.3,9495.3 ; v1@11959.7,9034.7 cw(c11946.89,9021.89) 11965,9021.89 cw(c11983.11,9021.89) v1@11970.3,9034.7 ; v1@11959.7,9045.3 ccw(c11946.89,9058.11) 11965,9058.11 ccw(c11983.11,9058.11) v1@11970.3,9045.3 ; 12018.78,8906.22 ccw(c12035,8922.43) v1@12035,8899.5 ; 12023.61,8901.39 cw(c12014.22,8892) v1@12027.5,8892
NetC57_1: C57.1 R37.6 R50.4 U15.5 | length 919.3
  Top Layer w10: R37.6@10640,8040 10710,8040 10725.5,8055.5 10725.5,8089.5 10725.5,8240.5 10689,8277 ; R50.4@10643.81,8277 10677,8277 ; 10689,8291 10689,8289 10677,8277 ; 10725.5,8069 10725.5,8070.5 10740,8085 ; 10725.5,8100.15 10725.5,8099.5 10740,8085 ; 10730,8085 10740,8085 ; U15.5@10811.5,8085.59 10810.91,8085 10740,8085 ; C57.1@10900,8390 10900,8425 10890,8435 10700,8435 10689,8424 10689,8277 ; 10677,8277 10689,8277
NetC58_1: C58.1 R26.7 R32.4 U13.9 | length 1240.4
  Top Layer w10: R32.4@8200,9072 8239.23,9072 ; R26.7@8217.01,9200 8217.01,9167.99 8260,9125 8260,9085 ; 8230,9072 8333,9072 8439,8966 8631,8966 8690,9025 8690,9200 8665,9225 C58.1@8615,9225 8615,9273 8550.77,9337.23 8550.77,9367 8558.18,9374.41 U13.9@8600,9374.41 ; 8245,9072 8247,9072 8260,9085 ; 8260,9072 8260,9085 ; 8280,9072 8273,9072 8260,9085
NetC59_1: C59.1 R38.2 R39.1 U8.9 | length 922.8
  Top Layer w10: C59.1@10730,8995 v1(10870,8995) 10870,8730 10907.36,8692.64 U8.9@11000,8692.64 ; R38.2@10842.99,9187 10895,9187 R39.1@10955.01,9187
  Bottom Layer w10: v1@10864.7,9000.3 ccw(c10851.89,9013.11) 10870,9013.11 ccw(c10888.11,9013.11) v1@10875.3,9000.3 ; v1@10870,8996 10870,9157 v1(10900,9187) ; v1@10892.5,9187 cw(c10874.39,9187) 10887.2,9174.2 cw(c10900,9161.39) v1@10900,9179.5
NetC60_1: C60.1 R26.5 R32.2 U13.13 | length 963.8
  Top Layer w10: R32.2@8211.81,9107 8211.81,9138.19 8150,9200 v1(8150,9235) R26.5@8217.01,9235 ; C60.1@8455,9225 v1(8455,9285) 8505,9335 8505,9465 8516.77,9476.77 U13.13@8600,9476.77
  Bottom Layer w10: v1(8150,9235) 8180,9265 8435,9265 v1(8455,9285) ; v1@8150,9242.5 ccw(c8150,9260.61) 8162.8,9247.8 ccw(c8175.61,9235) v1@8157.5,9235 ; v1@8447.5,9285 cw(c8429.39,9285) 8442.2,9272.2 cw(c8455,9259.39) v1@8455,9277.5
NetC61_1: C61.1 R37.4 R50.6 U15.1 | length 765.2
  Top Layer w10: R37.4@10640,8072 v1(10696,8072) 10696,8232.01 10683.01,8245 R50.6@10640,8245 ; U15.1@10811.5,8187.95 10820,8196.46 10820,8255 C61.1@10820,8390 ; 10819.54,8196 U15.1@10828.05,8187.5
  Bottom Layer w10: v1(10696,8072) 10820,8196 v1(10820,8234) ; v1@10696,8079.5 ccw(c10696,8097.61) 10708.8,8084.8 ccw(c10721.61,8072) v1@10703.5,8072 ; v1@10814.7,8228.7 cw(c10801.89,8215.89) 10820,8215.89 cw(c10838.11,8215.89) v1@10825.3,8228.7
NetC62_1: C62.1 R26.3 R31.8 U13.11 | length 873.4
  Top Layer w10: R31.8@8142.99,9365 v1(8143,9295) 8171,9267 R26.3@8217.01,9267 ; C62.1@8535,9225 8535,9305 v1(8525,9315) 8525,9410 8540.59,9425.59 U13.11@8600,9425.59
  Bottom Layer w10: v1(8143,9295) 8420,9295 8440,9315 v1(8525,9315) ; v1@8148.3,9289.7 cw(c8161.11,9276.89) 8161.11,9295 cw(c8161.11,9313.11) v1@8148.3,9300.3 ; v1@8519.7,9309.7 ccw(c8506.89,9296.89) 8506.89,9315 ccw(c8506.89,9333.11) v1@8519.7,9320.3
NetC63_1: C63.1 R37.2 R50.8 U15.3 | length 660.2
  Top Layer w10: R37.2@10640,8107 v1(10640,8160) R50.8@10640,8210 ; C63.1@10740,8390 10740,8265 v1(10750,8255) 10750,8150 10763.23,8136.77 U15.3@10811.5,8136.77
  Bottom Layer w10: v1@10634.7,8165.3 ccw(c10621.89,8178.11) 10640,8178.11 ccw(c10658.11,8178.11) v1@10645.3,8165.3 ; v1(10640,8160) 10640,8228 10667,8255 v1(10750,8255) ; v1@10744.7,8249.7 ccw(c10731.89,8236.89) 10731.89,8255 ccw(c10731.89,8273.11) v1@10744.7,8260.3
NetC64_1: C64.1 R26.1 R31.6 U13.5 | length 618.3
  Top Layer w10: R31.6@8142.99,9400 8240,9400 ; 8202,9400 8204.02,9400 8217.01,9387.01 ; 8216,9400 8217.01,9398.99 8217.01,9387.01 ; R26.1@8217.01,9312 8217.01,9387.01 ; 8298,9400 8302,9400 8315,9387 ; 8315,9400 8315,9387 ; C64.1@8375,9225 8375,9284.99 8315,9344.99 8315,9387 ; U13.5@8381.5,9400 8330,9400 ; 8217.01,9387.01 8230,9400 8330,9400 ; 8315,9387 8328,9400 8330,9400
NetC65_1: C65.1 R38.8 R39.7 U8.13 | length 609.6
  Top Layer w10: R38.8@10842.99,9085 10925,9085 R39.7@10955.01,9085 10955.01,9030.01 10925,9000 10925,8960 ; 10925,8937 10925,8947 10938,8960 ; 10925,8986 10925,8973 10938,8960 ; U8.13@11000,8795 10950,8795 10925,8820 10925,8960 ; C65.1@11000,8960 10938,8960 ; 10925,8960 10938,8960
NetC66_1: C66.1 R38.6 R39.5 U8.11 | length 922.6
  Top Layer w10: C66.1@10650,9000 10650,9035 10662,9047 v1(10900,9047) 10900,8765 10921.18,8743.82 U8.11@11000,8743.82 ; R38.6@10842.99,9120 10895,9120 R39.5@10955.01,9120
  Bottom Layer w10: v1@10894.7,9052.3 ccw(c10881.89,9065.11) 10900,9065.11 ccw(c10918.11,9065.11) v1@10905.3,9052.3 ; v1@10894.7,9114.7 cw(c10881.89,9101.89) 10900,9101.89 cw(c10918.11,9101.89) v1@10905.3,9114.7 ; v1(10900,9047) v1(10900,9120)
NetC68_2: C68.2 R46.2 R48.1 U4.5 | length 375.4
  Top Layer w20: U4.5@11680,7880 11680,7835 11695,7820 11760,7820 11770,7810 C68.2@11770,7770 ; R46.2@11770,7680 C68.2@11770,7770 ; R48.1@11870,7770 C68.2@11770,7770
NetD4_2: D4.2 L1.1 U18.2 | length 1430.5
  Top Layer w40: D4.2@8072,9872 8235,9872 8305,9942 9067.82,9942 9150,10024.18 9150,10145 ; D4.2@8095.07,9887 U18.2@8095.07,10055.66
  other v1: 9057,10117 9102,10117 9152,10117 9197,10117 9242,10142 9242,10192 9242,10247 9242,10292 9242,10347 9242,10387
NetDS1_1: DS1.1 R6.2 | length 100
  Top Layer w10: R6.2@10820,10595 DS1.1@10820,10695
NetDS2_2: DS2.2 R49.2 | length 95
  Top Layer w20: DS2.2@8222,6787 R49.2@8222,6882
NetDS3_2: DS3.2 R47.2 | length 95
  Top Layer w20: DS3.2@8502,6787 R47.2@8502,6882
NetDS4_1: DS4.1 R272.1 | length 2490.8
  Top Layer w10: DS4.1@7573,8953 7573,9019 7635,9081 v1(7700,9081) ; v1(9789,9091) R272.1@9868,9091
  Bottom Layer w10: v1(7700,9081) 7762,9143 8896,9143 8948,9091 v1(9789,9091) ; v1@7700,9088.5 ccw(c7700,9106.61) 7712.8,9093.8 ccw(c7725.61,9081) v1@7707.5,9081 ; v1@9783.7,9085.7 ccw(c9770.89,9072.89) 9770.89,9091 ccw(c9770.89,9109.11) v1@9783.7,9096.3
NetLS1_2: LS1.2 Q2.3 | length 682
  Top Layer w10: Q2.3@9972.76,10590 10115,10590 10145,10560 10145,10485 10163,10467 10492,10467 LS1.2@10540,10515
NetQ2_1: Q2.1 R3.2 R4.1 | length 207.7
  Top Layer w20: R3.2@10067,10345 R4.1@10067,10433 10067.24,10433.24 Q2.1@10067.24,10552.6
NetQ3_1: Q3.1 R5.2 R7.1 | length 176.7
  Top Layer w12: Q3.1@8759.24,10559.6 8845.4,10559.6 R5.2@8850,10555 ; R5.2@8844,10561 R7.1@8844,10645
NetR11_1: R11.1 U6.6 | length 138.5
  Top Layer w10: R11.1@10563,7400 10604,7400 U6.6@10701.5,7400
NetR11_3: R11.3 U6.5 | length 142.4
  Top Layer w10: R11.3@10563,7435 10602,7435 10611.41,7425.59 U6.5@10701.5,7425.59
NetR11_5: R11.5 U6.4 | length 145
  Top Layer w10: R11.5@10563,7467 10605,7467 10620.82,7451.18 U6.4@10701.5,7451.18
NetR11_7: R11.7 U6.3 | length 148.9
  Top Layer w10: R11.7@10563,7502 10604,7502 10629.23,7476.77 U6.3@10701.5,7476.77
NetR13_1: R13.1 U6.9 | length 191.1
  Top Layer w10: U6.9@10920,7350 10965,7350 10987,7328 R13.1@10987,7212.99
NetR13_3: R13.3 U6.10 | length 280.8
  Top Layer w10: U6.10@10920,7374.41 10874.41,7374.41 10863.07,7363.07 10863.07,7291.93 10875,7280 10930,7280 10952,7258 R13.3@10952,7212.99
NetR13_5: R13.5 U6.11 | length 313.5
  Top Layer w10: R13.5@10920,7212.99 10920,7240 10905,7255 10860,7255 10834.5,7280.5 10834.5,7364.5 10870,7400 U6.11@10920,7400
NetR13_7: R13.7 U6.12 | length 356.6
  Top Layer w10: R13.7@10885,7212.99 10837.01,7212.99 10804.57,7245.43 10804.57,7369.57 10860.59,7425.59 U6.12@10920,7425.59
NetR16_2: R16.2 U17.6 | length 232.5
  Top Layer w10: R16.2@11064.5,7213.35 11064.5,7235.5 11014.57,7285.43 11014.57,7350.43 11033.54,7369.41 U17.6@11081.5,7369.41
NetR16_4: R16.4 U17.7 | length 196
  Top Layer w10: U17.7@11081.5,7343.82 11126.18,7343.82 11138,7332 11138,7293 11103.3,7258.3 11103.3,7217.16 R16.4@11099.5,7213.35
NetR16_6: R16.6 U17.14 | length 363.9
  Top Layer w10: R16.6@11131.5,7213.35 11131.5,7241.5 11160,7270 11160,7295 ; 11160,7280.36 11160,7295 ; U17.14@11300,7446.18 11220.32,7446.18 11160,7385.87 11160,7295
NetR16_8: R16.8 U17.13 | length 306.6
  Top Layer w10: R16.8@11166.5,7213.35 11166.5,7251.5 11180,7265 11180,7375.87 11224.72,7420.59 U17.13@11300,7420.59
NetR17_2: R17.2 U17.12 | length 276.3
  Top Layer w10: R17.2@11216.5,7212.99 11225,7221.49 11225,7243 11199.5,7268.5 11199.5,7360.36 11234.13,7395 U17.12@11300,7395
NetR17_4: R17.4 U17.11 | length 235.9
  Top Layer w10: R17.4@11260,7213.8 11260,7253.86 11226.5,7287.36 11226.5,7357.36 11238.54,7369.41 U17.11@11300,7369.41
NetR17_6: R17.6 U17.10 | length 195.7
  Top Layer w10: R17.6@11292,7213.8 11292,7251.86 11246.5,7297.36 11246.5,7332.36 11257.95,7343.82 U17.10@11300,7343.82
NetR17_8: R17.8 U17.9 | length 115.6
  Top Layer w10: U17.9@11300,7318.23 11300,7284 11327,7257 R17.8@11327,7213.8
NetR18_7: R18.7 R18.8 R22.2 U7.5 | length 469
  Top Layer w10: R22.2@8261.81,7785 8320,7785 8333,7798 R18.7@8380,7798 R18.8@8442.99,7798 ; R18.8@8454.8,7798 8461.8,7805 8600,7805 8630.59,7774.41 8685,7774.41 U7.5@8648.3,7774.41
NetR19_1: R19.1 U2.4 | length 1005.2
  Top Layer w10: U2.4@11691.5,9801.18 11763.82,9801.18 11775,9790 11775,9725 11845,9655 11911,9655 11937,9629 11957,9609 11957,9562 12085,9434 12085,9425 12085,9057.01 R19.1@12097.01,9045
NetR19_3: R19.3 U2.6 | length 1008.4
  Top Layer w10: U2.6@11691.5,9750 11745,9750 11750,9745 11750,9705 11830,9625 11910,9625 11935,9600 11935,9550 12048,9437 12048,9021.01 12059.01,9010 R19.3@12097.01,9010